# Altium PCB Capstone.PcbDoc
Units mil, origin at the board's own origin, x right, y up, seen from the top; angles counter-clockwise.
Board outline 6000 x 4000 mil, 2 copper layers (Top Layer, Bottom Layer), stack 61.756 mil thick; 43 components, 28 nets, 186 pads, 9 vias.
Unrouted connection lines stored in the file: 75.
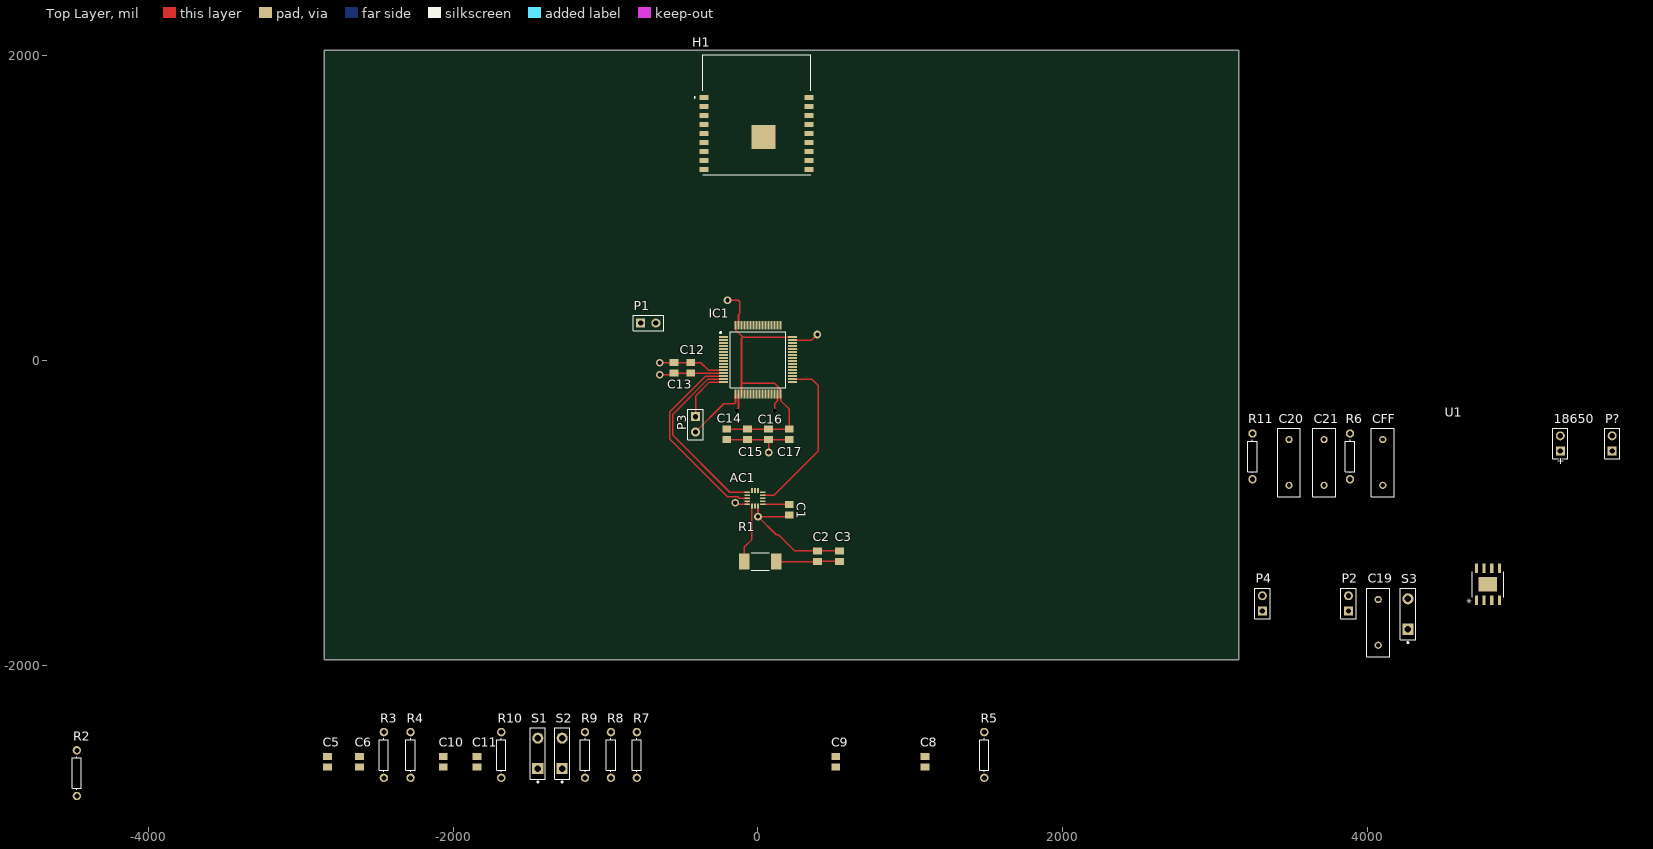
[diagram p0: Top Layer view]
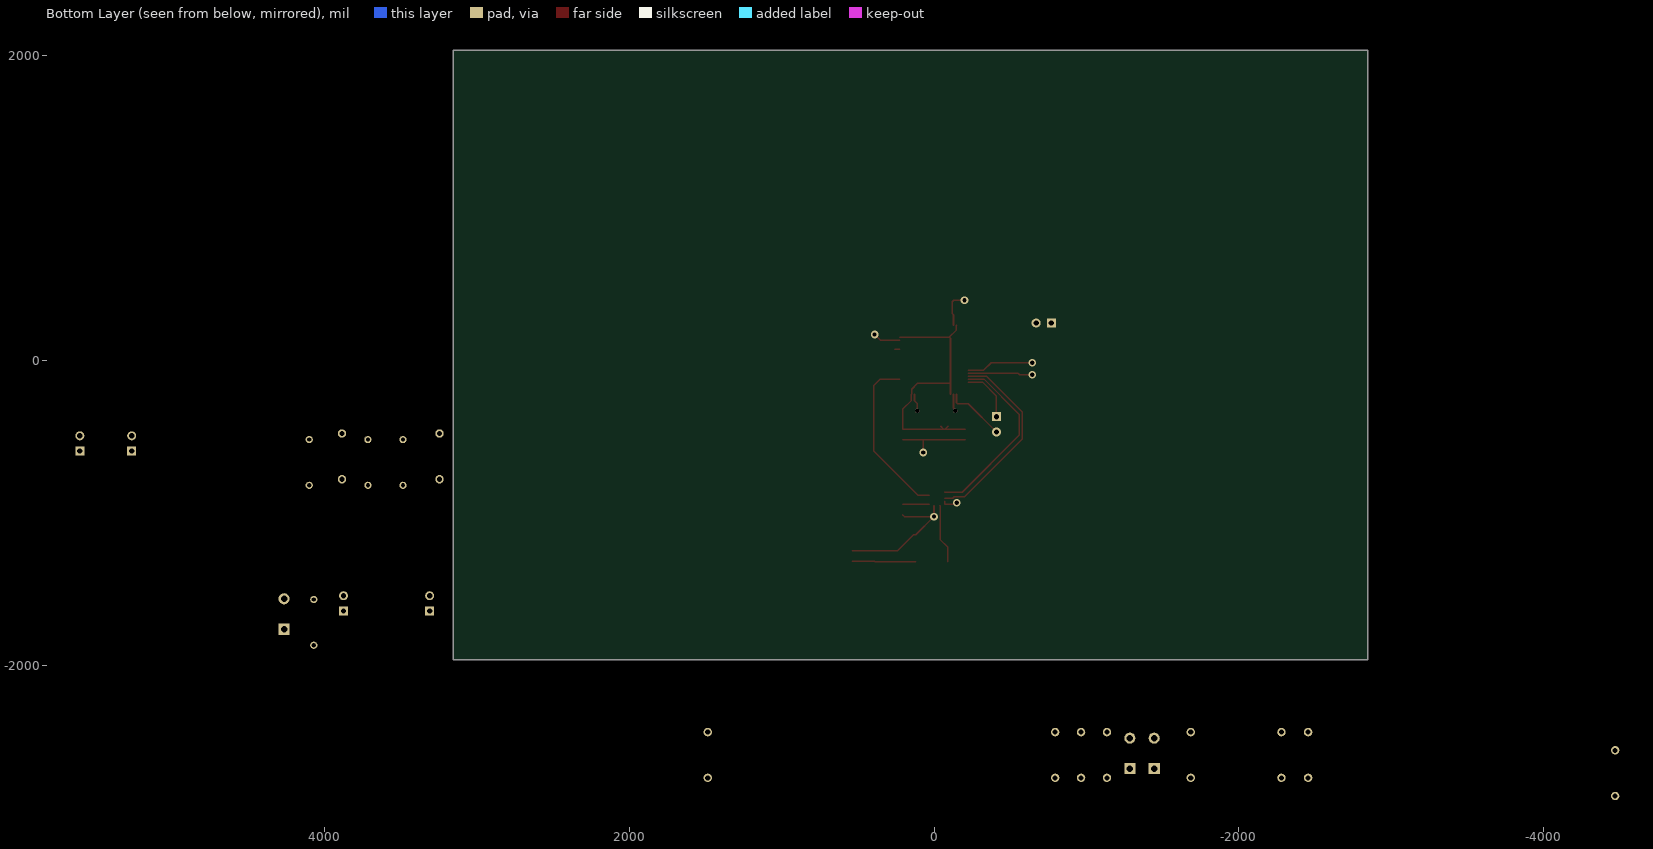
[diagram p1: Bottom Layer view, seen from below]

## Layer stack, top to bottom
Top Solder: solder mask 1, SM-001, Dk 4
Top Layer: signal copper 1.3779
Dielectric 1: core 59, Core-043, Dk 4.3
Bottom Layer: signal copper 1.3779
Bottom Solder: solder mask 1, SM-001, Dk 4

## Board outline
-2845,-1965 3155,-1965 3155,2035 -2845,2035

## Design rules (kind name [scope] priority, off if disabled: settings)
Clearance [All] p1: gap=10 ignorepadtopadclearanceinfootprint=FALSE except(0: Arc-Hole Track-Hole SMDPad-Hole THPad-Hole Via-Hole Fill-Hole Poly-Hole Region-Hole Text-Hole; 6: Arc-Arc Arc-Track Arc-SMDPad Track-Track Track-SMDPad SMDPad-SMDPad)
DiffPairsRouting [All] p1: maxlimit=10 minlimit=6 mostfreqgap=10 toplayer_minwidth=15 toplayer_maxwidth=15 toplayer_prefwidth=15 bottomlayer_minwidth=15 bottomlayer_maxwidth=15 bottomlayer_prefwidth=15 maxuncoupledlength=500
PolygonConnect [All] p1: connectstyle=Relief reliefconductorwidth=10 reliefentries=4 polygonreliefangle="90 Angle" airgapwidth=10
RoomDefinition Capstone [InComponentClass('Capstone')] p1: confinementstyle=ConfineOut formatcopy=TRUE lockcomponents=FALSE outline -3000,-2965 4720,-2965 4720,-2015 -3000,-2015
RoutingVias [All] p1: holewidth=28 width=50 viastyle="Through Hole" minholewidth=28 minwidth=50 maxholewidth=28 maxwidth=50
SolderMaskExpansion [All] p1: expansion=4
Width [All] p1: maxlimit=10 minlimit=10 preferedwidth=10
29 further rules are at their usual default settings.

## Classes and differential pairs
component class Capstone: 18650 AC1 C1 C2 C3 C5 C6 C8 C9 C10 C11 C12 C13 C19 C20 C21 CFF H1 IC1 P1 P2 P3 P4 P? R1 R2 R3 R4 R5 R6 R7 R8 R9 R10 R11 S1 S2 S3 U1

## Components (designator, comment, footprint, x,y, rotation, side; value= is the part's Value field where it differs from the comment)
18650 "Battery" BAT-2 5265,-545 r90 top
AC1 "ADXL362BCCZ-RL7" CC-16-4 -19.69,-904.8 r180 top
C1 "Cap" *CAPC2012X88N 205,-980 r270 top value=1uF
C2 "Cap" *CAPC2012X88N 390,-1285 r270 top value=0.1uF
C3 "Cap" *CAPC2012X88N 535,-1284.45 r90 top value=1uF
C5 "Cap" *CAPC2012X88N -2825,-2634.45 r90 top value=0.1uF
C6 "Cap" *CAPC2012X88N -2615,-2634.45 r90 top value=0.1uF
C8 "Cap" *CAPC2012X88N 1095,-2634.45 r90 top value=10uF
C9 "Cap" *CAPC2012X88N 510,-2634.45 r90 top value=0.1uF
C10 "Cap" *CAPC2012X88N -2065,-2634.45 r90 top value=0.1uF
C11 "Cap" *CAPC2012X88N -1845,-2634.45 r90 top value=0.1uF
C12 "Cap" *CAPC2012X88N -441,-49.45 r270 top value=10nF
C13 "Cap" *CAPC2012X88N -551,-49.45 r270 top value=1uF
C14 "Cap" *CAPC2012X88N -205,-485 r90 top value=4.7uF
C15 "Cap" *CAPC2012X88N -68.33,-485 r90 top value=100nF
C16 "Cap" *CAPC2012X88N 68.33,-485 r90 top value=100nF
C17 "Cap" *CAPC2012X88N 205,-485 r90 top value=100nF
C19 "Cap" RAD-0.3 4070,-1719.45 r90 top value=0.1uF
C20 "Cap" RAD-0.3 3485,-670 r90 top value=10uF
C21 "Cap" RAD-0.3 3715,-670 r90 top value=10uF
CFF "Cap" RAD-0.3 4100,-670 r90 top value=2700pF
H1 "ESP-WROOM-02D" ESPWROOM02D -36.85,1611.06 r0 top
IC1 "STM32L433RCT6" QFP50P1200X1200X160-64N 0,5 r0 top
P1 "Reset" HDR1X2 -770,245 r0 top
P2 "USART1_TX" HDR1X2 3875,-1644.45 r90 top
P3 "Debug" HDR1X2 -410,-370 r270 top
P4 "USART1_RX" HDR1X2 3310,-1644.45 r90 top
P? "MCU_VDD" HDR1X2 5605,-595 r90 top
R1 "Res1" RES_WSC_2515 15,-1320 r0 top value=50
R2 "Res1" AXIAL-0.3 -4470,-2708.9 r90 top value=1K
R3 "Res1" AXIAL-0.3 -2455,-2589.45 r90 top value=10K
R4 "Res1" AXIAL-0.3 -2280,-2589.45 r90 top value=10K
R5 "Res1" AXIAL-0.3 1485,-2589.45 r90 top value=1K
R6 "Res1" AXIAL-0.3 3885,-630 r90 top value=2K
R7 "Res1" AXIAL-0.3 -795,-2589.45 r90 top value=10K
R8 "Res1" AXIAL-0.3 -965,-2589.45 r90 top value=10K
R9 "Res1" AXIAL-0.3 -1135,-2589.45 r90 top value=10K
R10 "Res1" AXIAL-0.3 -1685,-2589.45 r90 top value=82K
R11 "Res1" AXIAL-0.3 3245,-630 r90 top value=357
S1 "SW-PB" SPST-2 -1445,-2579.45 r90 top
S2 "SW-PB" SPST-2 -1285,-2579.45 r90 top
S3 "SW-PB" SPST-2 4265,-1664.45 r90 top
U1 "Part Number: LP38511MRX-ADJ/NOPB" MRA08B 4790,-1470 r90 top value=Value

## Footprints (in the part's own frame and the unit in brackets; to place one, negate y for a bottom-side part, rotate by r counter-clockwise, add the part's x,y. Pads: shape width x height; smd on the part's side, far side on the other; paste and mask are expansions set on the pad)
*CAPC2012X88N [mm]
  rect 1.16x1.47 smd: 1(-0.875,0) 2(0.875,0)
AXIAL-0.3 [mm] "Axial Device, Thru-Hole; 2 Leads; 0.3 in Pin Spacing"
  round 1.4 hole 0.85: 1(-3.81,0) 2(3.81,0)
  silkscreen extent -2.77,-0.76 2.77,0.76
BAT-2 [mm] "Battery; 2 Leads"
  rect 1.5x1.5 hole 0.9: 1(-1.27,0)
  round 1.5 hole 0.9: 2(1.27,0)
  silkscreen extent -2.54,-1.27 2.54,1.27
CC-16-4 [mm]
  rect 0.925x0.3 smd: 1(-1.288,1) 2(-1.288,0.5) 3(-1.288,0) 4(-1.288,-0.5) 5(-1.288,-1) 9(1.287,-1) 10(1.287,-0.5) 11(1.287,0) 12(1.287,0.5) 13(1.287,1)
  rect 0.3x0.8 smd: 6(-0.5,-1.275) 7(0,-1.275) 8(0.5,-1.275) 14(0.5,1.275) 15(0,1.275) 16(-0.5,1.275)
  silkscreen extent -1.98,1 -1.93,1.04
ESPWROOM02D [mm]
  rect 1.5x0.9 smd: 1(-8.025,2.9) 2(-8.025,1.4) 3(-8.025,-0.1) 4(-8.025,-1.6) 5(-8.025,-3.1) 6(-8.025,-4.6) 7(-8.025,-6.1) 8(-8.025,-7.6) 9(-8.025,-9.1) 10(9.475,-9.1) 11(9.475,-7.6) 12(9.475,-6.1) 13(9.475,-4.6) 14(9.475,-3.1) 15(9.475,-1.6) 16(9.475,-0.1) 17(9.475,1.4) 18(9.475,2.9)
  rect 4x4 smd: 19(1.825,-3.71)
  silkscreen extent -9.72,-10 9.72,10
HDR1X2 [mm] "Connector; Header; 2 Position"
  rect 1.5x1.5 hole 0.9: 1(0,0)
  round 1.5 hole 0.9: 2(2.54,0)
  silkscreen extent -1.27,-1.27 3.81,1.27
MRA08B [mil]
  rect 63x21 smd paste+0 mask+0: 1(-104.5,75) 2(-104.5,25) 3(-104.5,-25) 4(-104.5,-75) 5(104.5,-75) 6(104.5,-25) 7(104.5,25) 8(104.5,75)
  rect 95x122 smd paste-60.5 mask+0: EPAD(0,0)
  silkscreen extent -84,-103 84,103, body extent 0,0 10,10, height 10
QFP50P1200X1200X160-64N [mm]
  rect 1.475x0.3 smd: 1(-5.738,3.75) 2(-5.738,3.25) 3(-5.738,2.75) 4(-5.738,2.25) 5(-5.738,1.75) 6(-5.738,1.25) 7(-5.738,0.75) 8(-5.738,0.25) 9(-5.738,-0.25) 10(-5.738,-0.75) 11(-5.738,-1.25) 12(-5.738,-1.75) 13(-5.738,-2.25) 14(-5.738,-2.75) 15(-5.738,-3.25) 16(-5.738,-3.75) 33(5.738,-3.75) 34(5.738,-3.25) 35(5.738,-2.75) 36(5.738,-2.25) 37(5.738,-1.75) 38(5.738,-1.25) 39(5.738,-0.75) 40(5.738,-0.25) 41(5.738,0.25) 42(5.738,0.75) 43(5.738,1.25) 44(5.738,1.75) 45(5.738,2.25) 46(5.738,2.75) 47(5.738,3.25) 48(5.738,3.75)
  rect 0.3x1.475 smd: 17(-3.75,-5.738) 18(-3.25,-5.738) 19(-2.75,-5.738) 20(-2.25,-5.738) 21(-1.75,-5.738) 22(-1.25,-5.738) 23(-0.75,-5.738) 24(-0.25,-5.738) 25(0.25,-5.738) 26(0.75,-5.738) 27(1.25,-5.738) 28(1.75,-5.738) 29(2.25,-5.738) 30(2.75,-5.738) 31(3.25,-5.738) 32(3.75,-5.738) 49(3.75,5.738) 50(3.25,5.738) 51(2.75,5.738) 52(2.25,5.738) 53(1.75,5.738) 54(1.25,5.738) 55(0.75,5.738) 56(0.25,5.738) 57(-0.25,5.738) 58(-0.75,5.738) 59(-1.25,5.738) 60(-1.75,5.738) 61(-2.25,5.738) 62(-2.75,5.738) 63(-3.25,5.738) 64(-3.75,5.738)
  silkscreen extent -6.35,-4.65 4.65,4.65, body extent -6,-6 6,6, height 1.6
RAD-0.3 [mm] "Radial Cap, Thru-Hole; 2 Leads; 0.3 in Pin Spacing"
  round 1.2 hole 0.7: 1(-3.81,0) 2(3.81,0)
  silkscreen extent -5.71,-1.91 5.71,1.91
RES_WSC_2515 [mil]
  rect 69x103 smd paste+0 mask+0: 1(-105.5,0) 2(105.5,0)
  silkscreen extent -59,-56 59,56, body extent 0,0 10,10, height 10
SPST-2 [mm] "Switch; 2 Leads"
  rect 1.85x1.85 hole 1.1: 1(-2.54,0)
  round 1.85 hole 1.1: 2(2.54,0)
  silkscreen extent -4.89,-1.27 4.28,1.27

## Part data
18650: "Multicell Battery", LatestRevisionDate=17-Jul-2002, LatestRevisionNote="Re-released for DXP Platform.", PackageDescription="Battery; 2 Leads", PackageReference=BAT-2, Published=24-Mar-1999, Publisher="Altium Limited"
AC1: "Accelerometer", Manufacturer_Name="Analog Devices", Mouser Part Number=584-ADXL362BCCZ-R7, Datasheet Link=http://www.analog.com/media/en/technical-documentation/data-sheets/ADXL362.pdf, Manufacturer_Part_Number=ADXL362BCCZ-RL7, Mouser Price/Stock=https://www.mouser.com/Search/Refine.aspx?Keyword=584-ADXL362BCCZ-R7
C1 C2 C3 C5 C6 C8 C9 C10 C11 C12 C13 C14 C15 C16 C17 C19 C20 C21 CFF: "Capacitor", LatestRevisionDate=17-Jul-2002, LatestRevisionNote="Re-released for DXP Platform.", PackageDescription="Radial Cap, Thru-Hole; 2 Leads; 0.3 in Pin Spacing", PackageReference=RAD-0.3, Published=8-Jun-2000, Publisher="Altium Limited"
H1: "Hardware", Manufacturer_Name=Espressif, Mouser Part Number=356-ESPWROOM-02D, Datasheet Link=https://br.mouser.com/datasheet/2/891/esp-wroom-02d_esp-wroom-02u_datasheet_en-1365835.pdf, Height=3.2mm, Manufacturer_Part_Number=ESP-WROOM-02D
IC1: "Integrated Circuit", Manufacturer_Name=STMicroelectronics, Mouser Part Number=511-STM32L433RCT6, Datasheet Link=https://www.st.com/resource/en/datasheet/stm32l433rc.pdf, Height=1.6mm, Manufacturer_Part_Number=STM32L433RCT6, Mouser Price/Stock=https://www.mouser.com/Search/Refine.aspx?Keyword=511-STM32L433RCT6
P1 P2 P3 P4 P?: library part "Header 2", "Header, 2-Pin", LatestRevisionDate=17-Jul-2002, LatestRevisionNote="Re-released for DXP Platform.", Publisher="Altium Limited"
R1 R2 R3 R4 R5 R6 R7 R8 R9 R10 R11: "Resistor", LatestRevisionDate=17-Jul-2002, LatestRevisionNote="Re-released for DXP Platform.", PackageDescription="Axial Device, Thru-Hole; 2 Leads; 0.3 in Pin Spacing", PackageReference=AXIAL-0.3, Published=8-Jun-2000, Publisher="Altium Limited"
S1 S2 S3: "Switch", LatestRevisionDate=17-Jul-2002, LatestRevisionNote="Re-released for DXP Platform.", PackageDescription="Switch; 2 Leads", PackageReference=SPST-2, Published=24-Mar-1999, Publisher="Altium Limited"
U1: library part LP38511MRX-ADJ/N, "No Description Available", Manufacturer_Part_Number=LP38511MRX-ADJ/NOPB, Built_By=EMA_UL_Team, Copyright="Copyright (C) 2018 Accelerated Designs. All rights reserved", RefDes=RefDes, Type=DEV, Vendor="Texas Instruments"

## Via types
v1: diameter 50, hole 28, Top Layer to Bottom Layer, 7 vias
v2: diameter 28, hole 28, Top Layer to Bottom Layer, 2 vias

## Nets (pads, with @x,y where several pads share a name; then routed paths per layer and width w, separated by ;. In a path a pad name is that pad's centre, name@x,y a point inside that pad or via, vN(x,y) a via of type N, cw(c..) or ccw(c..) an arc to the next point about the centre after c; other vN are vias at no path point)
ADXL362_CS: AC1.8 IC1.44 | length 32.1
  Top Layer w10: IC1.44 226.81,72.99 257.62,72.99
ADXL362_INT1: AC1.11 IC1.14 | length 1298.2
  Top Layer w10: IC1.14 -343.27,-103.27 -580,-340 -580,-515 -200,-895 -133.43,-895 -123.63,-904.8 AC1.11
ADXL362_INT2: AC1.9 IC1.15 | length 1210.3
  Top Layer w10: IC1.15 -327.95,-122.95 -560,-355 -560,-490 -185,-865 -70.81,-865 AC1.9
ADXL362_MISO: AC1.7 IC1.35
ADXL362_MOSI: AC1.6 IC1.36
ADXL362_SCK: AC1.4 IC1.34 | length 1100.7
  Top Layer w10: AC1.4 104.88,-885.12 395,-595 395,-165 352.95,-122.95 IC1.34
EN: C5.1 C11.2 H1.2 R3.2 S2.2
GND: 18650.2 AC1.12 AC1.13 AC1.16 C1.2 C2.1 C3.2 C5.2 C6.2 C8.2 C9.2 C10.1 C11.1 C12.1 C13.1 C14.1 C15.1 C16.1 C17.1 C19.1 C20.1 C21.1 H1.9 H1.13 H1.18 H1.19 IC1.12 IC1.18 IC1.31 IC1.47 IC1.63 P?.2 R2.2 R9.1 R10.1 R11.1 S1.1 S2.1 S3.1 U1.5 | length 2597.5
  Top Layer w10: v1(-645,-15) C13.1 C12.1 -375,-15 -326.1,-63.9 IC1.12 ; C14.1 C15.1 C16.1 C16.1@68.88,-520 ; v1(-200,395) -199.18,394.18 -130,394.18 -120,384.18 -120,306.78 -127.95,298.83 IC1.63 ; v1(-150,-935) -139.18,-935 -130,-944.17 AC1.13 AC1.12 ; v2(-140,-330) -140,-325.13 -127.95,-313.08 IC1.18 ; AC1.16 v1(0,-1025) ; v1(70,-605) 70,-521.12 C16.1@68.88,-520 ; v2(110,-330) 110,-282.9 127.95,-264.94 IC1.31 ; C1.2 194.45,-1025 v1(0,-1025) ; C17.1 204.45,-520 C16.1@68.88,-520 ; IC1.47 352.95,132.95 v1(390,170) ; C3.2 390.55,-1250 C2.1 240.55,-1250.55 135,-1145 120,-1145 v1(0,-1025)
IO0: C10.2 S1.2
Net18650_1: 18650.1 C20.2 U1.6 U1.7 U1.8
NetAC1_14: AC1.14 R1.1 | length 386.2
  Top Layer w10: R1.1 -90.5,-1225.5 -40,-1175 -40,-955.63 AC1.14
NetC19_2: C19.2 P1.1 S3.2
NetCFF_1: CFF.1 R6.1 R11.2 U1.3
NetH1_6: H1.6 R9.2
NetH1_7: H1.7 R8.2
NetH1_8: H1.8 R7.2
NetH1_11: H1.11 P2.2
NetH1_12: H1.12 P4.2
NetH1_16: H1.16 R10.2
NetIC1_7: IC1.7 P1.2
NetIC1_16: IC1.16 P3.1 | length 357.4
  Top Layer w10: P3.1 -410,-235 -317.64,-142.64 IC1.16
NetIC1_17: IC1.17 P3.2 | length 398.3
  Top Layer w10: P3.2 -225,-285 -155.86,-285 -147.64,-276.78 IC1.17
RST: C6.1 H1.15 R4.2
STLINK_SWCLK: IC1.49 R2.1
STLINK_SWDIO: IC1.46 R5.1
USART1_RX: IC1.43 P4.1
USART1_TX: IC1.42 P2.1
VDD33: AC1.1 C1.1 C2.2 C3.1 C8.1 C9.1 C12.2 C13.2 C14.2 C15.2 C16.2 C17.2 C21.2 CFF.2 H1.1 IC1.13 IC1.19 IC1.32 IC1.48 IC1.64 P?.1 R1.2 R3.1 R4.1 R5.2 R6.2 R7.1 R8.1 U1.1 U1.2 | length 2831.4
  Top Layer w10: v1(-645,-95) -562.1,-95 C13.2 C12.2 -440.69,-83.58 IC1.13 ; C14.2 C15.2@-74.44,-450.55 ; IC1.64 -146.73,230 -146.73,199.19 -100.18,152.64 ; IC1.19 -108.27,-150 ; C15.2@-92.27,-432.72 C15.2@-74.44,-450.55 ; C15.2@-44.4,-432.72 C15.2@-62.23,-450.55 ; AC1.1 203.62,-944.17 C1.1 ; R1.2 389.45,-1320 C2.2 534.45,-1319.45 C3.1 ; IC1.48 -100.18,152.64 ; -108.27,-150 -108.27,144.55 -100.18,152.64 ; -108.27,-150 107.54,-150 146.73,-189.19 146.73,-220 IC1.32 147.95,-221.22 147.95,-262.95 205,-320 C17.2 C16.2 C15.2@-62.23,-450.55 ; C15.2@-74.44,-450.55 C15.2 C15.2@-62.23,-450.55
pads on no net: AC1.2 AC1.3 AC1.5 AC1.10 AC1.15 H1.3 H1.4 H1.5 H1.10 H1.14 H1.17 IC1.1 IC1.2 IC1.3 IC1.4 IC1.5 IC1.6 IC1.8 IC1.9 IC1.10 IC1.11 IC1.20 IC1.21 IC1.22 IC1.23 IC1.24 IC1.25 IC1.26 IC1.27 IC1.28 IC1.29 IC1.30 IC1.33 IC1.37 IC1.38 IC1.39 IC1.40 IC1.41 IC1.45 IC1.50 IC1.51 IC1.52 IC1.53 IC1.54 IC1.55 IC1.56 IC1.57 IC1.58 IC1.59 IC1.60 IC1.61 IC1.62 U1.4 U1.EPAD

## Text inside footprints (layer, text, board x,y; h text height)
18650: Top Overlay "+" at 5287.72,-689.49 h45.28 r90
U1: Top Overlay "*" at 4699,-1597 h50 r90; Mechanical 7 "0.035in/0.889mm" at 5008,-1668.25 h25 r90; Mechanical 7 "0.05in/1.27mm" at 4752.5,-1857 h25 r90; Mechanical 7 "0.196in/4.978mm" at 4802.5,-1271.5 h25 r90; Mechanical 7 "0.244in/6.198mm" at 4522,-1563.75 h25 r90; Mechanical 7 "0.157in/3.988mm" at 4597,-1563.75 h25 r90; Mechanical 7 "Alt 2 Padstyle: OX90Y60D30P" at 5388,-1807.5 h50 r90; Mechanical 7 "Alt 1 Padstyle: OX60Y90D30P" at 5328,-1807.5 h50 r90; Mechanical 7 "Heat Tab Padstyle: RX95Y122D0T" at 5208,-1845 h50 r90; Mechanical 7 "Pin One Padstyle: RX63Y21D0T" at 5148,-1820 h50 r90; Mechanical 7 "Default Padstyle: RX63Y21D0T" at 5088,-1820 h50 r90; Mechanical 13 "*" at 4745,-1546 h50 r90